# Altium PCB 08-声音传感器模块-电路板图.PcbDoc
Units mm, origin at the board's own origin, x right, y up, seen from the top; angles counter-clockwise.
Board outline 70.61 x 35.3 mm, 2 copper layers (Top Layer, Bottom Layer); 18 components, 7 nets, 57 pads, 14 vias.
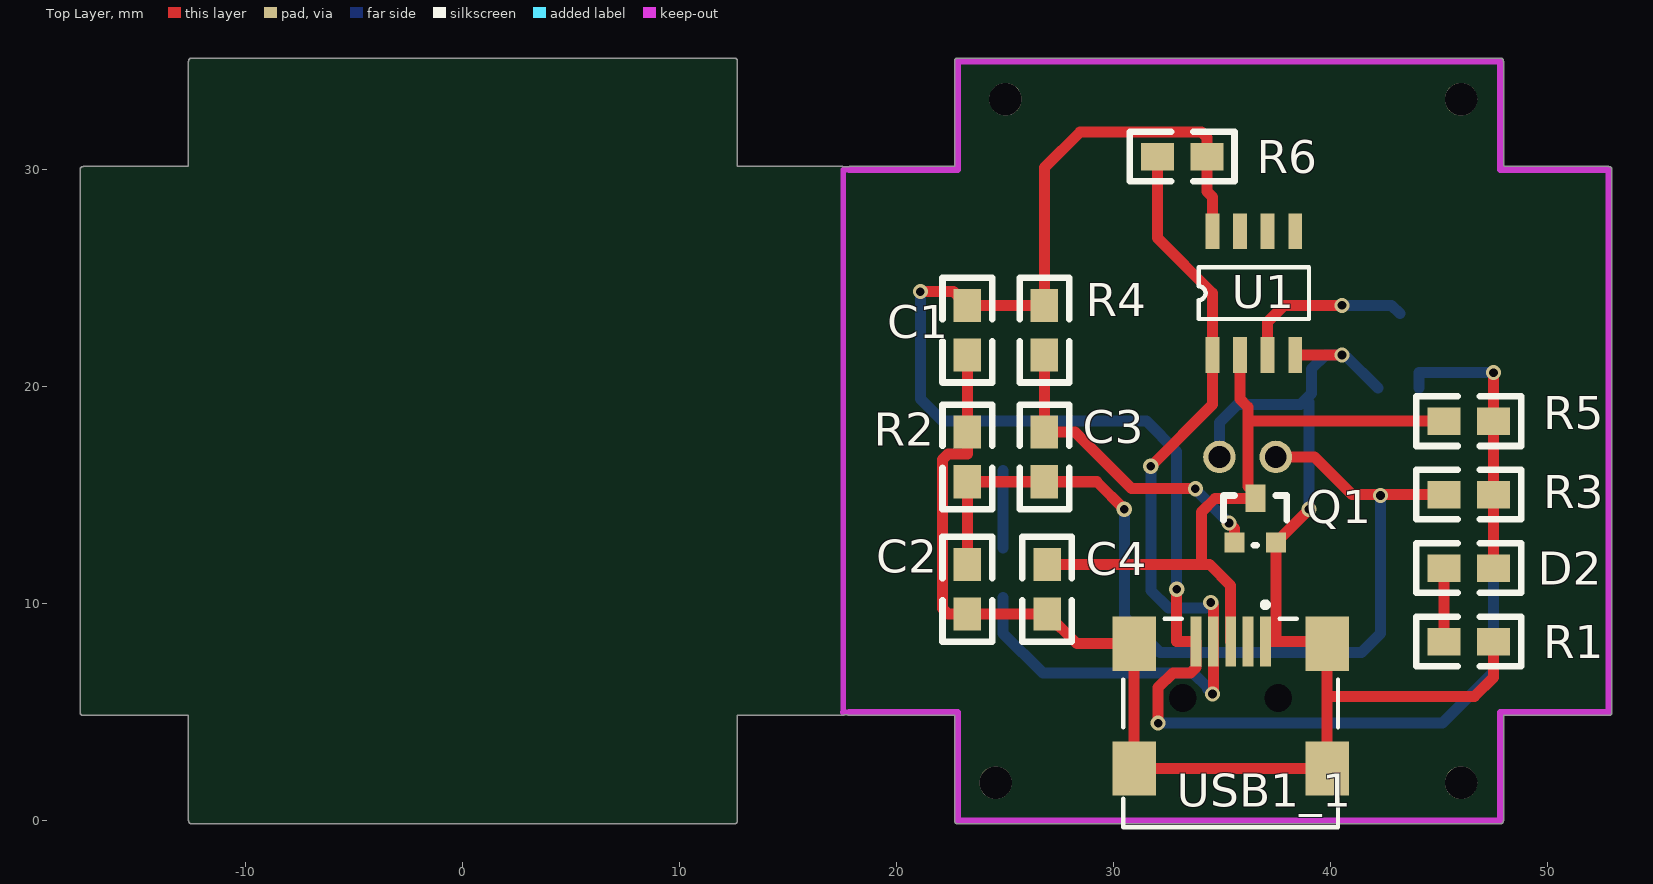
[diagram p0: Top Layer view]
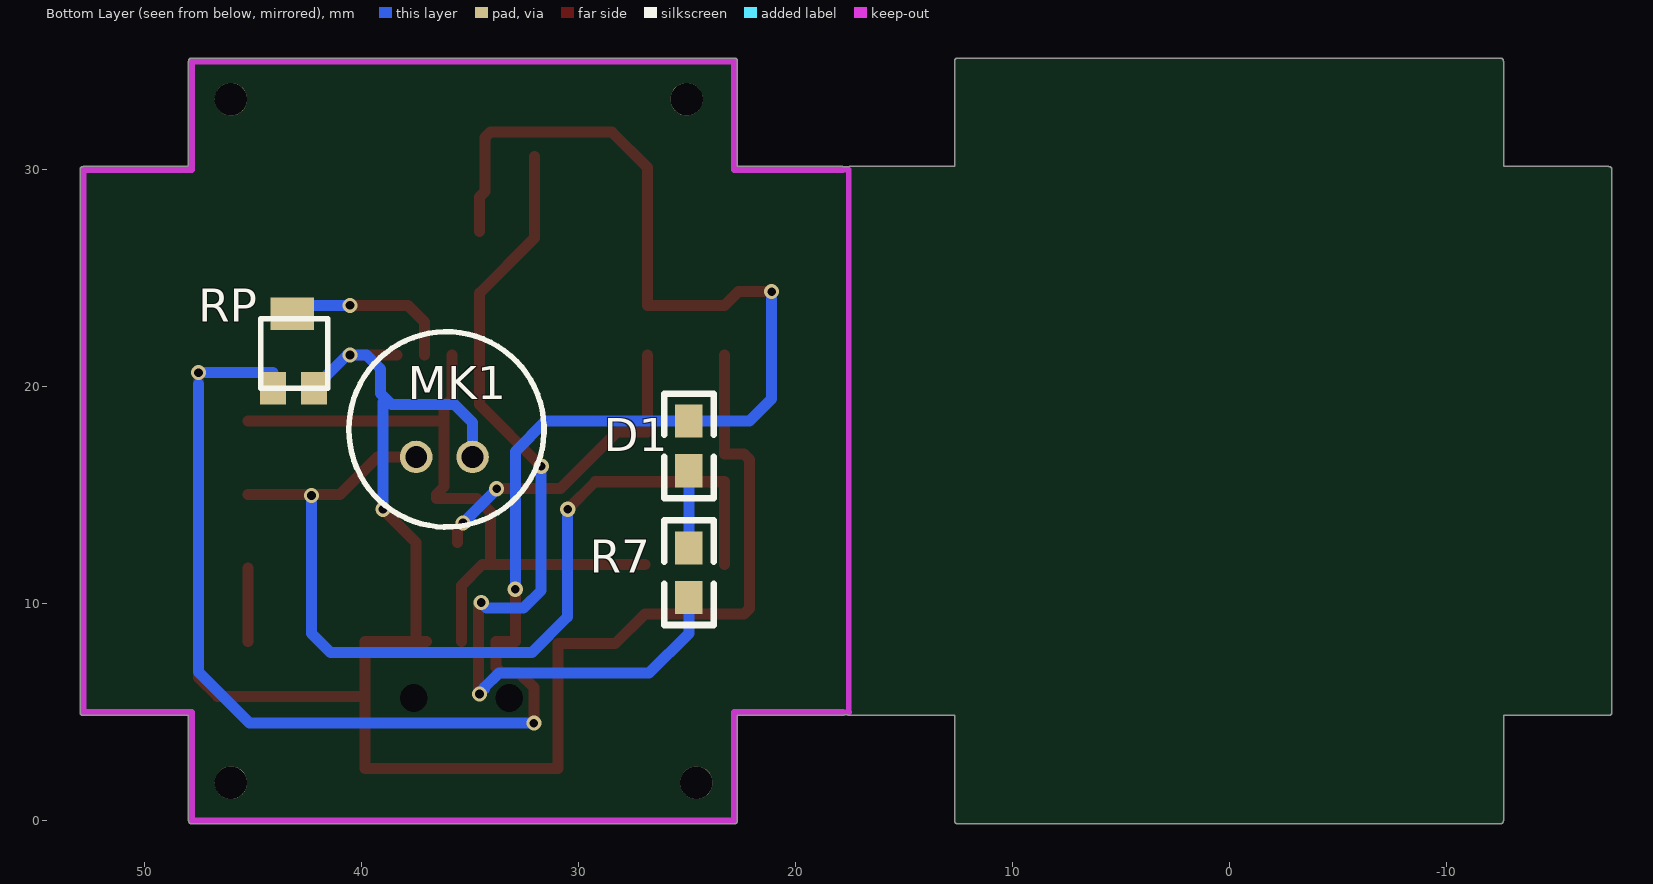
[diagram p1: Bottom Layer view, seen from below]

## Layer stack, top to bottom
Top Layer: signal copper 0.0356
Dielectric: dielectric 0.32, FR-4, Dk 4.8
Bottom Layer: signal copper 0.0356

## Board outline
-12.65,0 -12.65,4.85 -17.5,4.85 cw(c-17.5,5) -17.65,5 -17.65,30 cw(c-17.5,30) -17.5,30.15 -12.65,30.15 -12.65,35 cw(c-12.5,35) -12.5,35.15 12.5,35.15 cw(c12.5,35) 12.65,35 12.65,30.15 17.5,30.15 cw(c17.5,30) 17.58,30.127 17.726,30.127 cw(c17.806,30) 17.806,30.15 22.656,30.15 22.656,35 cw(c22.806,35) 22.806,35.15 47.806,35.15 cw(c47.806,35) 47.956,35 47.956,30.15 52.806,30.15 cw(c52.806,30) 52.956,30 52.956,5 cw(c52.806,5) 52.806,4.85 47.956,4.85 47.956,0 cw(c47.806,0) 47.806,-0.15 22.806,-0.15 cw(c22.806,0) 22.656,0 22.656,4.85 17.806,4.85 cw(c17.806,5) 17.726,4.873 17.58,4.873 cw(c17.5,5) 17.5,4.85 12.65,4.85 12.65,0 cw(c12.5,0) 12.5,-0.15 -12.5,-0.15 cw(c-12.5,0)

## Design rules (kind name [scope] priority, off if disabled: settings)
Clearance [All] p1: gap=0.254
PolygonConnect [All] p1: connectstyle=Relief reliefconductorwidth=0.254 reliefentries=4 polygonreliefangle="90 Angle"
RoutingVias [All] p1: holewidth=1.5 width=1.5 viastyle="Through Hole" minholewidth=1.5 minwidth=1.5 maxholewidth=1.5 maxwidth=1.5
SilkscreenOverComponentPads [All] p1: minsilkscreentomaskgap=0.254
SolderMaskExpansion [All] p1: expansion=0.102
TestPointUsage FabricationTestPointUsage [All] p1: valid=0 allowmultiple=FALSE
Testpoint FabricationTestpoint [All] p1: side=3 testpointundercomponent=TRUE minsize=1.016 maxsize=2.54 preferedsize=1.524 minholesize=0 maxholesize=1.016 preferedholesize=0.813 testpointgrid=0.025 style=297 order=0123456789
Width OTHER [All] p1: maxlimit=0.254 minlimit=0.254 preferedwidth=0.254
Width VCC [InNet('VCC')] p2: maxlimit=0.4 minlimit=0.4 preferedwidth=0.4
Width GND [InNet('GND')] p3: maxlimit=0.4 minlimit=0.4 preferedwidth=0.4
23 further rules are at their usual default settings.

## Classes and differential pairs
component class 原理图: C1 C2 D1 D2 F1 L1 R2 R3 R4 U1 USB1 VR1

## Components (designator, comment, footprint, x,y, rotation, side; value= is the part's Value field where it differs from the comment)
C1 "Cap" 0805 23.241,21.463 r90 top
C2 "Cap" 0805 23.241,9.525 r90 top
C3 "Cap" 0805 26.8,17.907 r270 top
C4 "Cap" 0805 26.924,11.811 r270 top
D1 "LED0" 0805 24.892,18.415 r270 bottom
D2 "LED0" 0805 47.498,11.641 r180 top
MK1 "Mic2" MT 36.068,17.907 r180 bottom
Q1 "NPN" sot-23 35.56,12.827 r0 top
R1 "res2" 0805 47.498,8.255 r180 top
R2 "res2" 0805 23.244,17.907 r270 top
R3 "res2" 0805 45.212,15.029 r0 top
R4 "res2" 0805 26.797,21.463 r90 top
R5 "res2" 0805 45.212,18.415 r0 top
R6 "res2" 0805 32.004,30.607 r0 top
R7 "res2" 0805 24.895,10.287 r90 bottom
RP "Res Tap" VR 43.18,20.955 r90 bottom
U1 "LM393" SOP-8 34.544,21.463 r90 top
USB1_1 "USB" USB/SM0.8-6H5 35.56,6.223 r90 top (schematic designator USB1)

## Footprints (in the part's own frame and the unit in brackets; to place one, negate y for a bottom-side part, rotate by r counter-clockwise, add the part's x,y. Pads: shape width x height; smd on the part's side, far side on the other; paste and mask are expansions set on the pad)
0805 [mil]
  rect 60x50 smd: 1(0,-0.06) 2(90,-0.06)
  silkscreen extent -50,-45 140,45
MT [mm]
  round 1.5 hole 1: 1(-1.397,-1.143) 2(1.203,-1.143)
  silkscreen extent -4.5,-4.37 4.5,4.63
SOP-8 [mil]
  rect 65x25 smd: 1(0,0) 2(0,-50) 3(0,-100) 4(0,-150) 5(224.41,-150) 6(224.41,-100) 7(224.41,-50) 8(224.41,0)
  silkscreen extent 65,-175 159,25
sot-23 [mil]
  rect 36x36 smd: 1(0,0) 2(75,0)
  rect 36x50 smd: 3(38,80)
  silkscreen extent -20,-5 95,85
USB/SM0.8-6H5 [mm]
  rect 2.3x0.5 smd: 1(2.032,1.778) 2(2.032,0.978) 3(2.032,0.178) 4(2.032,-0.622) 5(2.032,-1.422)
  rect 2.5x2 smd: 5(-3.822,-4.272) 5(-3.822,4.628) 5(1.932,4.628) 5(1.932,-4.272)
  round 0.6 hole 1.27 unplated: MH1(-0.568,2.378) MH2(-0.568,-2.022)
  silkscreen extent -6.52,-4.77 3.86,5.13
VR [mm]
  rect 1.5x1.2 smd: 1(-1.016,0.889) 2(-1.016,-1.016)
  rect 1.5x2 smd: 3(2.413,0)
  silkscreen extent -1.02,-1.65 2.18,1.45

## Part data
C1 C2 C3 C4: "Capacitor"
D1 D2: "Typical INFRARED GaAs LED"
MK1: "Microphone"
Q1: library part QNPN, "NPN Bipolar Transistor"
R1 R2 R3 R4 R5 R6 R7: "Resistor"
RP: "Tapped Resistor"
USB1_1: library part USB5

## Free pads (board coordinates)
  round 1.5 hole 1.5: 0(24.55,1.75) 0(25,33.25) 0(46,1.75) 0(46,33.25)

## Via types
v1: diameter 0.7, hole 0.4, Top Layer to Bottom Layer, 14 vias

## Nets (pads, with @x,y where several pads share a name; then routed paths per layer and width w, separated by ;. In a path a pad name is that pad's centre, name@x,y a point inside that pad or via, vN(x,y) a via of type N, cw(c..) or ccw(c..) an arc to the next point about the centre after c; other vN are vias at no path point)
A+: 
GND: 
NetC1_2: 
NetD2_2: 
NetU1_2: 
OUTA: 
VCC: 
pads on no net: C1.1 C1.2 C2.1 C2.2 C3.1 C3.2 C4.1 C4.2 D1.1 D1.2 D2.1 D2.2 MK1.1 MK1.2 Q1.1 Q1.2 Q1.3 R1.1 R1.2 R2.1 R2.2 R3.1 R3.2 R4.1 R4.2 R5.1 R5.2 R6.1 R6.2 R7.1 R7.2 RP.1 RP.2 RP.3 U1.1 U1.2 U1.3 U1.4 U1.5 U1.6 U1.7 U1.8 USB1_1.1 USB1_1.2 USB1_1.3 USB1_1.4 USB1_1.5 USB1_1.MH1 USB1_1.MH2
copper on no net: | length 331.5
  Top Layer w0.508: v1(21.082,24.384) 22.608,24.384 23.243,23.749 26.799,23.749 26.799,30.101 28.448,31.75 34.036,31.75 34.29,31.496 34.29,30.605 34.29,29.007 34.544,28.753 34.544,27.163 ; 23.243,11.811 23.243,15.621 26.799,15.621 29.21,15.621 v1(30.48,14.351) ; 23.243,21.463 23.243,17.907 23.243,16.891 22.352,16.891 22.098,16.637 22.098,9.779 22.352,9.525 23.243,9.525 26.922,9.525 28.292,8.155 30.932,8.155 30.932,2.401 39.832,2.401 39.832,8.255 ; 26.799,21.463 26.799,17.907 28.198,17.907 30.803,15.302 v1(33.757,15.302) ; 26.922,11.811 34.036,11.811 ; v1(31.699,16.332) 34.544,19.177 34.544,21.463 34.544,24.308 32.004,26.848 32.004,30.605 ; v1(32.039,4.496) 32.039,6.128 32.718,6.807 33.528,6.807 33.782,7.061 33.782,8.255 32.893,8.255 v1(32.893,10.668) ; v1(34.468,10.058) 34.582,9.944 34.582,8.255 34.582,5.88 v1(34.544,5.842) ; v1(35.306,13.716) 35.56,13.462 35.56,12.827 ; 35.382,8.255 35.382,10.846 34.417,11.811 34.036,11.811 ; 36.17,18.413 45.212,18.413 ; 36.982,8.255 37.592,8.255 ; 37.084,21.463 37.084,22.987 37.846,23.749 v1(40.513,23.749) ; 37.465,16.764 39.243,16.764 40.979,15.028 v1@42.291,15.028 ; 38.354,21.463 v1(40.513,21.463) ; v1(38.989,14.351) 37.465,12.827 37.465,8.382 37.592,8.255 ; 39.832,5.715 46.609,5.715 47.498,6.604 47.498,8.257 ; 39.832,8.155 39.732,8.255 37.592,8.255 ; v1(42.291,14.986) v1@42.291,15.028 ; 45.212,8.257 45.212,11.642 ; 45.212,15.028 v1@42.291,15.028 ; 47.498,11.642 47.498,15.028 47.498,18.413 v1(47.498,20.65) ; 34.036,11.811 34.036,14.224 34.671,14.859 36.525,14.859 36.525,15.037 36.17,15.392 36.17,19.075 35.814,19.431 35.814,19.685 ; 35.814,19.685 35.814,21.463 35.814,19.685
  Bottom Layer w0.508: v1(21.082,24.384) 21.082,19.431 22.098,18.415 24.894,18.415 31.496,18.415 32.893,17.018 v1(32.893,10.668) ; 24.894,10.287 24.894,8.634 26.73,6.798 33.656,6.798 34.325,6.128 34.325,6.061 v1(34.544,5.842) ; 24.894,12.573 24.894,16.129 ; v1(30.48,14.351) 30.48,9.398 32.131,7.747 41.402,7.747 42.291,8.636 v1(42.291,14.986) ; v1(31.699,16.332) 31.699,10.617 32.512,9.804 34.214,9.804 v1(34.468,10.058) ; v1(32.039,4.496) 45.136,4.496 47.498,6.858 47.498,20.117 ; v1(33.757,15.302) 33.757,15.265 v1(35.306,13.716) ; 34.865,16.764 34.865,18.355 35.687,19.177 38.608,19.177 39.116,19.685 39.116,20.828 39.751,21.463 v1(40.513,21.463) 40.64,21.463 42.164,19.939 ; v1(38.989,14.351) 38.989,19.304 ; v1(40.513,23.749) 42.799,23.749 43.18,23.368 ; 44.069,19.939 44.069,20.65 v1(47.498,20.65)

## Keep-outs
Keep-Out Layer:
  lines w0.254: 18.669,5 17.5,5 17.526,5.026 17.526,30 18.923,30
  lines w0.3: 17.806,5 22.806,5 22.806,0 47.806,0 47.806,5 52.806,5 52.806,30 47.806,30 47.806,35 22.806,35 22.806,30 17.806,30